# EAGLE board PCB v16 (EAGLE 9.7.0)
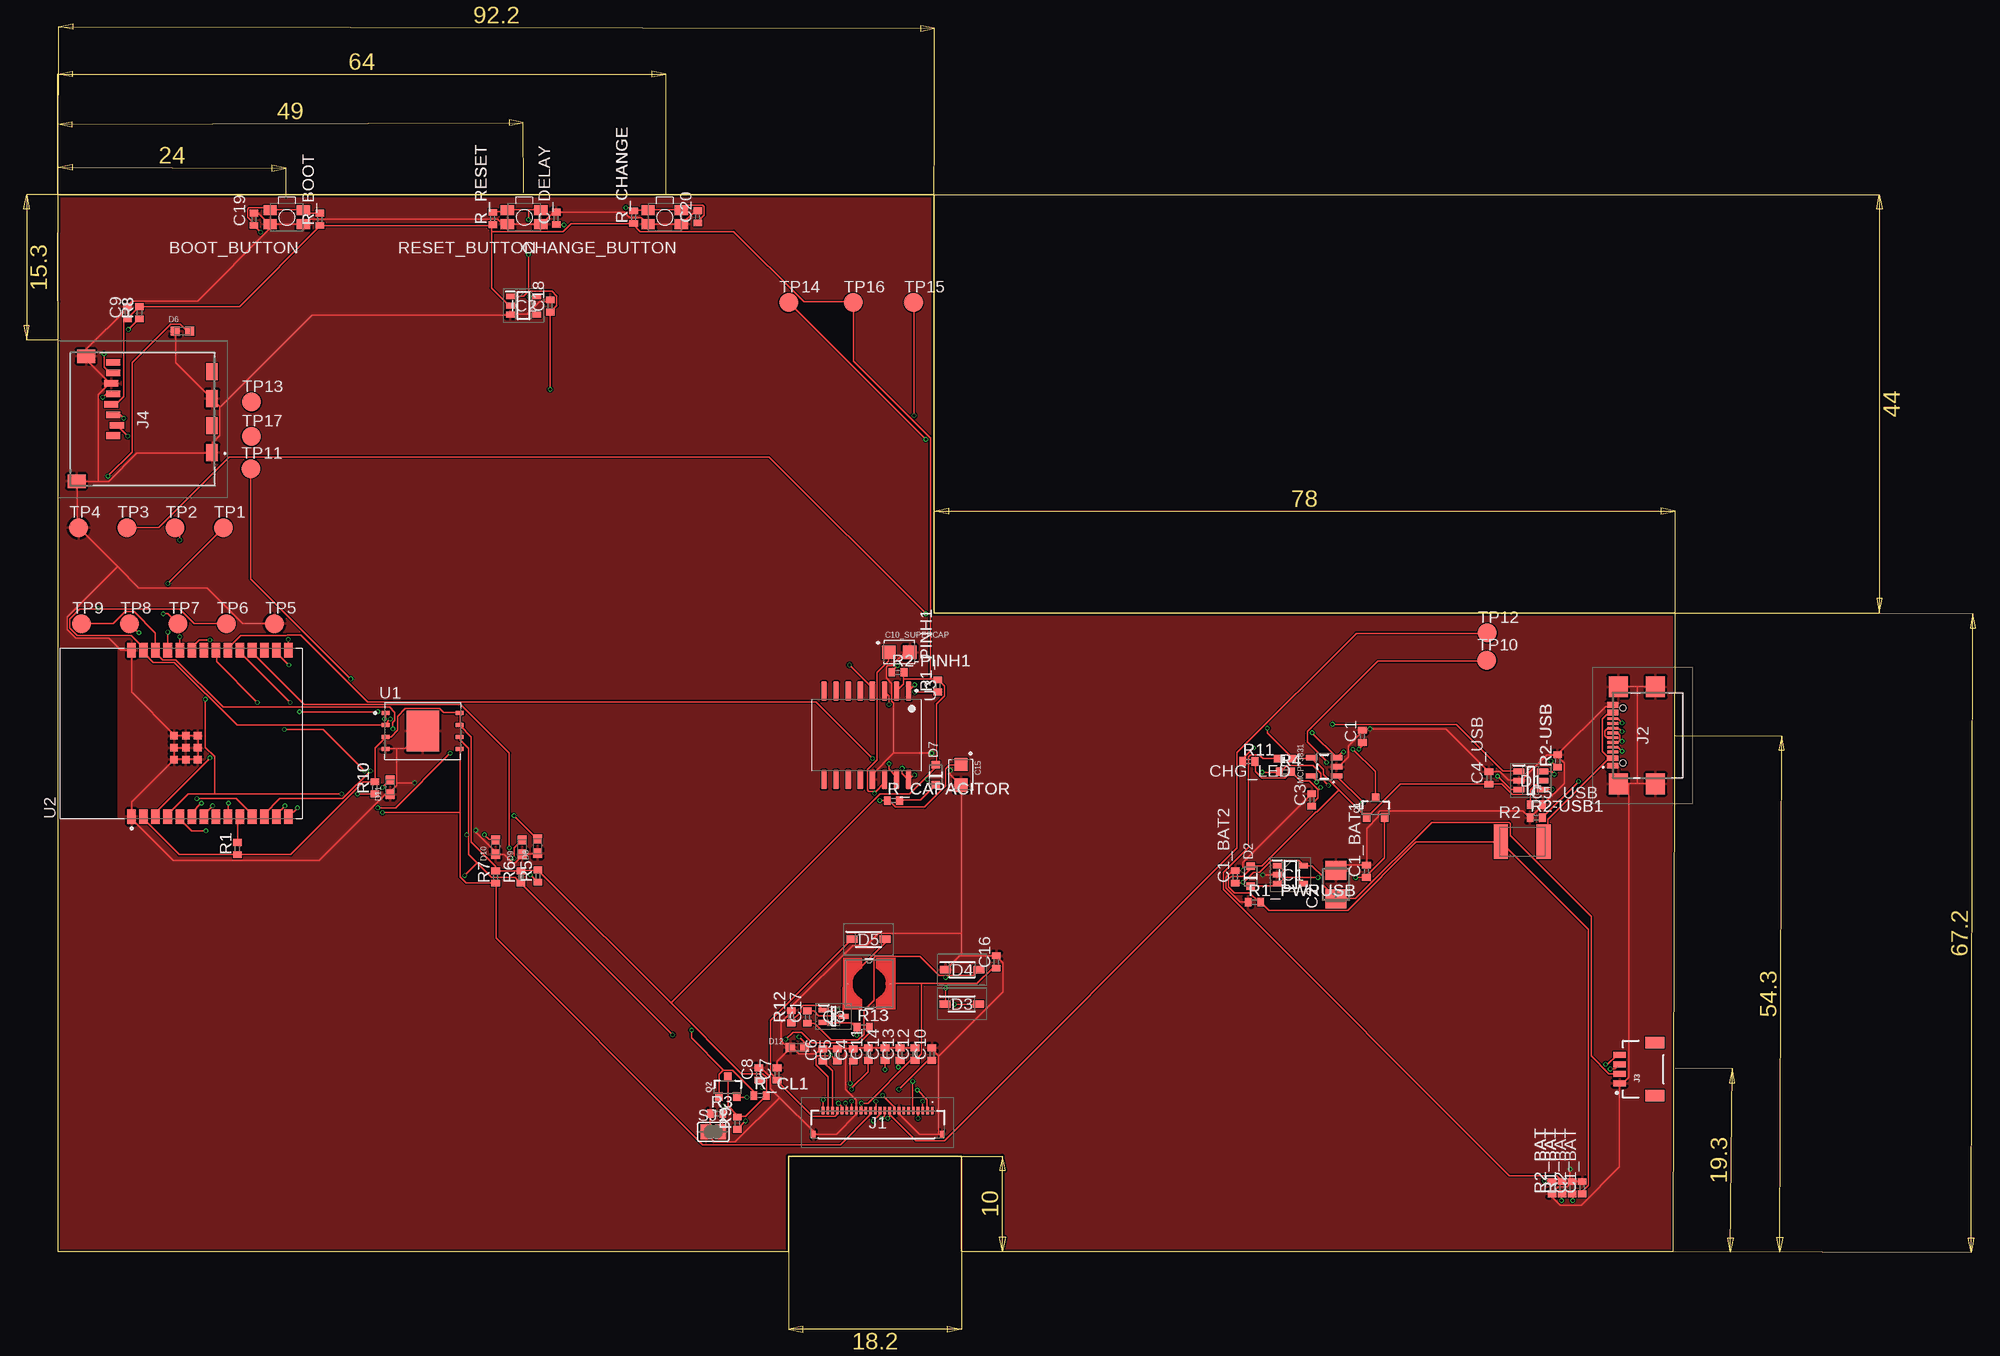
[diagram p0: board, top side]
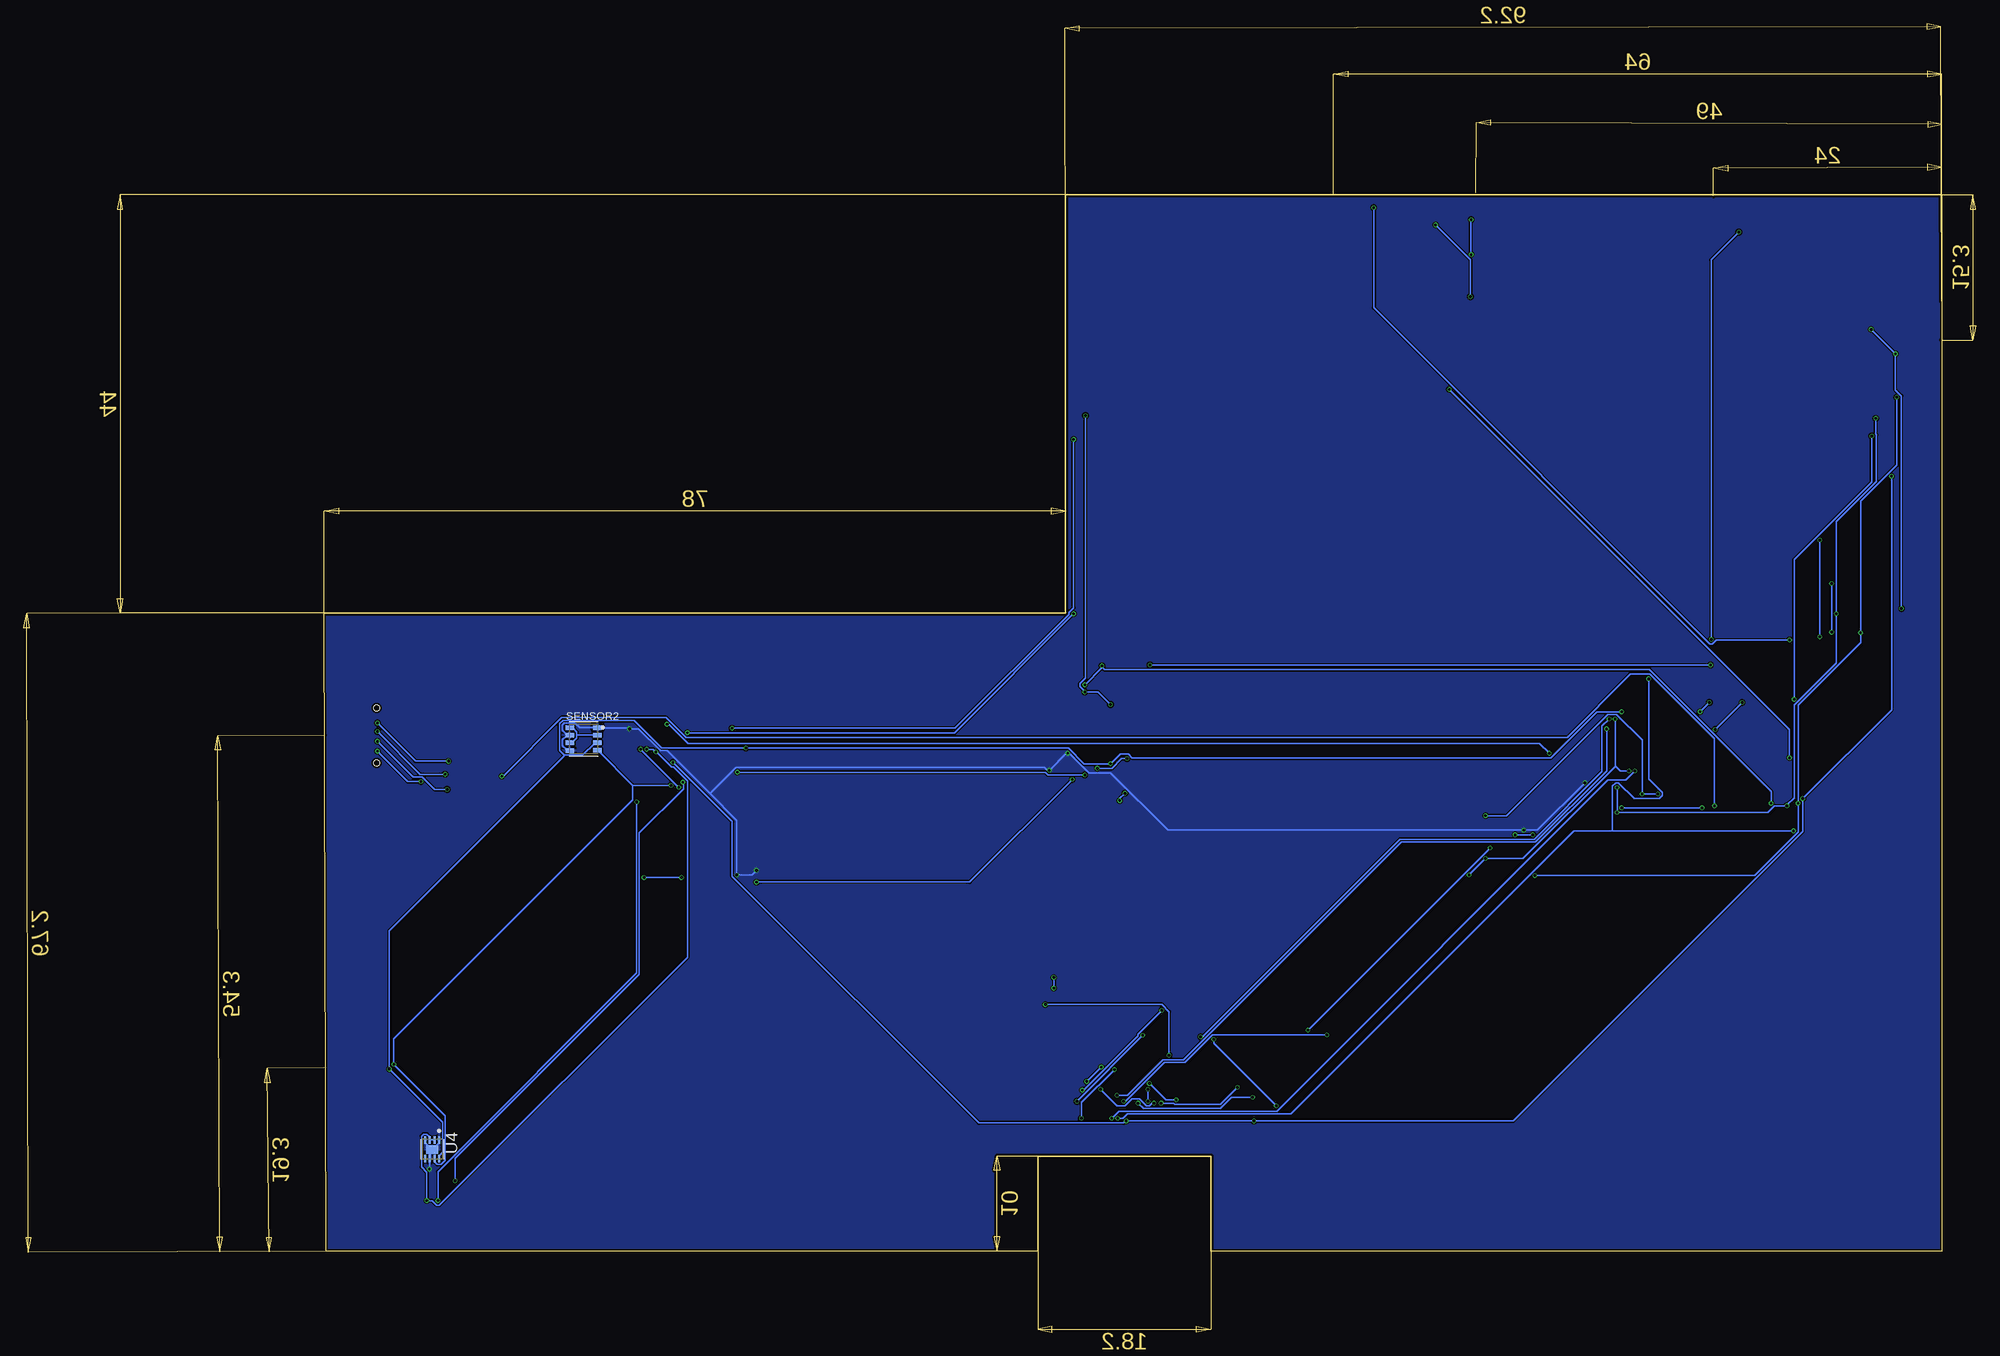
[diagram p1: board, bottom side, seen from below]

Size 170.2 x 111.2 mm. Coordinates in mm from the lower left corner, seen from the top.
Outline: 0,0 76.9,0 76.9,10 95.1,10 95.1,0 170,0 170.2,67.2 92.2,67.2 92.2,111.2 0,111.2 0,0
Copper layers (1*16): Top 0.035mm / dielectric 1.6mm / Bottom 0.035mm
Design rules "jlcpcb-2layers.dru": minimum track width 0.15mm, minimum drill 0.3mm, track to track 5mil, track to pad 5mil, pad to pad 5mil, via to via 5mil, smd to smd 5mil, copper to edge 0.2mm, drill to drill 6mil, minimum pad ring 10mil, minimum via ring 3mil, stop-mask expansion 4mil, vias tented up to drill 0mil, thermal gap 10mil

## Footprints (pad centres in the part's own frame; a part is rotated, then mirrored left to right if it is on the bottom)
MYBUTTON = smd 1.4 x 1.05: 1 1.75,0.75; 2 -1.75,0.75; 3 -1.75,-0.75; 4 1.75,-0.75
ESP32_WROVER_EAGLE-LTSPICE_C0402 = smd 0.7 x 0.9: 1 -0.65,0; 2 0.65,0
RCL_CT3528 = smd 2 x 2.2: + -1.5,0; - 1.5,0
CAPCP3225X100N = smd 1.4 x 1.4: 1 -1.1,0; 2 1.1,0
ADAFRUIT_CHIP-LED0603 = smd 0.8 x 0.8: A 0,-0.75; C 0,0.75
SOT95P280X145-6N = smd 1.2 x 0.6: 1 -1.25,0.95; 2 -1.25,0; 3 -1.25,-0.95; 4 1.25,-0.95; 5 1.25,0; 6 1.25,0.95
ESP32_WROVER_AVX---SD0805S020S1R0_AVX_SD0805S020S1R0_0 = smd 0.8 x 0.9: 1 -1.05,0; 2 1.05,0
SOD3716X135N = smd 1.15 x 0.8: 1 -1.75,0; 2 1.75,0
DIOC1608X36N = smd 0.97 x 0.94: 1 -0.75,0; 2 0.75,0
SOT95P280X120-5N = smd 0.9 x 0.6: 1 -1.4,0.95; 2 -1.4,0; 3 -1.4,-0.95; 4 1.4,-0.95; 5 1.4,0.95
SOT95P280X125-5N = smd 0.9 x 0.6: 1 -1.4,0.95; 2 -1.4,0; 3 -1.4,-0.95; 4 1.4,-0.95; 5 1.4,0.95
FH34SRJ24S05SH99 = smd 0.3 x 0.8: 1 5.75,1.45; 2 5.25,1.45; 3 4.75,1.45; 4 4.25,1.45; 5 3.75,1.45; 6 3.25,1.45; 7 2.75,1.45; 8 2.25,1.45; 9 1.75,1.45; 10 1.25,1.45; 11 0.75,1.45; 12 0.25,1.45; 13 -0.25,1.45; 14 -0.75,1.45; 15 -1.25,1.45; 16 -1.75,1.45; 17 -2.25,1.45; 18 -2.75,1.45; 19 -3.25,1.45; 20 -3.75,1.45; 21 -4.25,1.45; 22 -4.75,1.45; 23 -5.25,1.45; 24 -5.75,1.45 | smd 0.4 x 0.8: MP1 6.75,-1.05; MP2 -6.75,-1.05
SAMACSYS_PARTS_USB4110GFA = smd 0.3 x 1.15: A1 -3.35,3.678; A4 -2.55,3.678; A5 -1.25,3.678; A6 -0.25,3.678; A7 0.25,3.678; A8 1.25,3.678; A9 2.55,3.678; A12 3.35,3.678; B1 3.05,3.678; B4 2.25,3.678; B5 1.75,3.678; B6 0.75,3.678; B7 -0.75,3.678; B8 -1.75,3.678; B9 -2.25,3.678; B12 -3.05,3.678 | smd 2.18 x 2: MP1 -5.11,-0.827; MP2 5.11,-0.827; MP3 -5.11,3.103; MP4 5.11,3.103 | hole 0.65: -2.89,2.603; 2.89,2.603
JST04_1MM_RA = smd 0.6 x 1.35: 1 -1.5,0; 2 -0.5,0; 3 0.5,0; 4 1.5,0 | smd 1.2 x 2: NC1 2.8,-3.675; NC2 -2.8,-3.675
112ATAARR03ATTEND = smd 1.8 x 1.2: G1 10.6,10.4; G2 4.9,10.4; S1 7.75,10.4; S2 2.05,10.4 | smd 1.4 x 1.9: G3 13.6,-3.85; G4 0.45,-2.85 | smd 0.7 x 1.5: P1 8.8,0; P2 7.7,0.4; P3 6.6,0; P4 5.5,-0.2; P5 4.4,0; P6 3.3,-0.2; P7 2.2,0; P8 1.1,0
IND_4828-WE-TPC_WRE = smd 0.127 x 0.127: 1 -2.286,0; 2 2.286,0
ESP32_WROVER_SPARKFUN-IC-POWER_SOT23-5 = smd 0.55 x 1.2: 1 -0.95,-1.3; 2 0,-1.3; 3 0.95,-1.3; 4 0.95,1.3; 5 -0.95,1.3
ESP32_WROVER_SPARKFUN-DISCRETESEMI_SOT23-3 = smd 0.8 x 0.9: 1 -0.95,-1; 2 0.95,-1; 3 0,1.1
SOT65P210X110-3N = smd 1.05 x 0.5: 1 -1.05,0.65; 2 -1.05,-0.65; 3 1.05,0
ESP32_WROVER_EAGLE-LTSPICE_R0402 = smd 0.7 x 0.9: 1 -0.65,0; 2 0.65,0
ESP32C6_VARISTOR_CT/CN1812 = smd 1.5 x 3.6: 1 -2.25,0; 2 2.25,0
ESP32_WROVER_BME680_PSON80P300X300X100-8N = smd 1.016 x 0.5: 1 1.458,1.2; 2 1.458,0.4; 3 1.458,-0.4; 4 1.458,-1.2; 5 -1.458,-1.22; 6 -1.458,-0.4; 7 -1.458,0.4; 8 -1.458,1.2
SJ = smd 1.168 x 1.6: 1 -0.762,0; 2 0.762,0
TP20R = smd 2 x 2: TP 0,0
SON127P600X800X80-9N = smd 0.94 x 0.44: 1 -3.895,1.905; 2 -3.895,0.635; 3 -3.895,-0.635; 4 -3.895,-1.905; 5 3.895,-1.905; 6 3.895,-0.635; 7 3.895,0.635; 8 3.895,1.905 | smd 3.4 x 4.3: 9 0,0
XCVR_ESP32-C6-WROOM-1-N8 = smd 1.5 x 0.9: 1 -8.75,5.26; 2 -8.75,3.99; 3 -8.75,2.72; 4 -8.75,1.45; 5 -8.75,0.18; 6 -8.75,-1.09; 7 -8.75,-2.36; 8 -8.75,-3.63; 9 -8.75,-4.9; 10 -8.75,-6.17; 11 -8.75,-7.44; 12 -8.75,-8.71; 13 -8.75,-9.98; 14 -8.75,-11.25; 15 8.75,-11.25; 16 8.75,-9.98; 17 8.75,-8.71; 18 8.75,-7.44; 19 8.75,-6.17; 20 8.75,-4.9; 21 8.75,-3.63; 22 8.75,-2.36; 23 8.75,-1.09; 24 8.75,0.18; 25 8.75,1.45; 26 8.75,2.72; 27 8.75,3.99; 28 8.75,5.26 | smd 0.8 x 0.8: 29_1 -2.755,0.79; 29_2 -1.505,0.79; 29_3 -0.255,0.79; 29_4 -2.755,-0.46; 29_5 -1.505,-0.46; 29_6 -0.255,-0.46; 29_7 -2.755,-1.71; 29_8 -1.505,-1.71; 29_9 -0.255,-1.71
SOIC127P1032X265-16N = smd 2.05 x 0.59: 1 -4.655,4.445; 2 -4.655,3.175; 3 -4.655,1.905; 4 -4.655,0.635; 5 -4.655,-0.635; 6 -4.655,-1.905; 7 -4.655,-3.175; 8 -4.655,-4.445; 9 4.655,-4.445; 10 4.655,-3.175; 11 4.655,-1.905; 12 4.655,-0.635; 13 4.655,0.635; 14 4.655,1.905; 15 4.655,3.175; 16 4.655,4.445
SON50P200X200X80-9N = smd 0.76 x 0.27: 1 -0.985,0.75; 2 -0.985,0.25; 3 -0.985,-0.25; 4 -0.985,-0.75; 5 0.985,-0.75; 6 0.985,-0.25; 7 0.985,0.25; 8 0.985,0.75 | smd 0.9 x 1.3: 9 0,0

## Placement (x,y rotation side)
BOOT_BUTTON  BUTTON_CUSYOMV1  [MYBUTTON]  24.08,108.83 180 top
C1  100nF  [ESP32_WROVER_EAGLE-LTSPICE_C0402]  137.28,54.2 90 top
C1_BAT  4.7uF  [ESP32_WROVER_EAGLE-LTSPICE_C0402]  160.4,6.7 90 top
C1_BAT1  4.7uF  [ESP32_WROVER_EAGLE-LTSPICE_C0402]  137.7,40 90 top
C1_BAT2  4.7uF  [ESP32_WROVER_EAGLE-LTSPICE_C0402]  123.9,39.4 90 top
C2  100uF TANT  [RCL_CT3528]  134.48,38.6 90 top
C2_BAT  4.7uF  [ESP32_WROVER_EAGLE-LTSPICE_C0402]  159.35,6.7 90 top
C3  100nF  [ESP32_WROVER_EAGLE-LTSPICE_C0402]  131.96,47.5 90 top
C4  [ESP32_WROVER_EAGLE-LTSPICE_C0402]  83.71,20.65 90 top
C4_USB  100nF  [ESP32_WROVER_EAGLE-LTSPICE_C0402]  150.59,49.82 90 top
C5  [ESP32_WROVER_EAGLE-LTSPICE_C0402]  82,20.65 90 top
C5_USB  4.7uF  [ESP32_WROVER_EAGLE-LTSPICE_C0402]  155.6,47.02 0 top
C6  [ESP32_WROVER_EAGLE-LTSPICE_C0402]  80.49,20.65 90 top
C7  [ESP32_WROVER_EAGLE-LTSPICE_C0402]  75.68,18.65 90 top
C8  [ESP32_WROVER_EAGLE-LTSPICE_C0402]  73.77,18.65 90 top
C9  [ESP32_WROVER_EAGLE-LTSPICE_C0402]  7.3,98.8 90 top
C10  [ESP32_WROVER_EAGLE-LTSPICE_C0402]  91.98,20.75 90 top
C10_SUPERCAP  CPH3225A  [CAPCP3225X100N]  88.55,63.04 0 top
C11  [ESP32_WROVER_EAGLE-LTSPICE_C0402]  85.3,20.75 90 top
C12  [ESP32_WROVER_EAGLE-LTSPICE_C0402]  90.2,20.75 90 top
C13  [ESP32_WROVER_EAGLE-LTSPICE_C0402]  88.62,20.75 90 top
C14  [ESP32_WROVER_EAGLE-LTSPICE_C0402]  87.04,20.75 90 top
C15  100nF  [CAPCP3225X100N]  95.03,50.14 270 top
C16  [ESP32_WROVER_EAGLE-LTSPICE_C0402]  98.76,30.45 90 top
C17  [ESP32_WROVER_EAGLE-LTSPICE_C0402]  78.88,24.65 90 top
C18  [ESP32_WROVER_EAGLE-LTSPICE_C0402]  51.8,99.5 90 top
C19  100nF  [ESP32_WROVER_EAGLE-LTSPICE_C0402]  20.64,108.61 90 top
C20  100nF  [ESP32_WROVER_EAGLE-LTSPICE_C0402]  67.32,108.88 90 top
C_DELAY  100nF  [ESP32_WROVER_EAGLE-LTSPICE_C0402]  52.43,108.72 90 top
CHANGE_BUTTON  BUTTON_CUSYOMV1  [MYBUTTON]  63.86,108.83 180 top
CHG_LED  [ADAFRUIT_CHIP-LED0603]  129.14,51.85 90 top
D1  USBLC6-2SC6Y  [SOT95P280X145-6N]  155,49.54 0 top
D2  SD0805S020S1R0  [ESP32_WROVER_AVX---SD0805S020S1R0_AVX_SD0805S020S1R0_0]  125.53,39.46 90 top
D3  MBR0530  [SOD3716X135N]  95.12,26.03 0 top
D4  MBR0530  [SOD3716X135N]  95.16,29.63 0 top
D5  MBR0530  [SOD3716X135N]  85.3,32.83 0 top
D6  PGB1010603MR  [DIOC1608X36N]  13.1,96.84 0 top
D7  ESP32_WROVER_AVX---SD0805S020S1R0_AVX_SD0805S020S1R0_0_0AVX_SD0805S020S1R0_0_0  [ESP32_WROVER_AVX---SD0805S020S1R0_AVX_SD0805S020S1R0_0]  92.38,50.16 90 top
D8  PGB1010603MR  [DIOC1608X36N]  50.48,42.64 90 top
D9  PGB1010603MR  [DIOC1608X36N]  48.86,42.54 90 top
D10  PGB1010603MR  [DIOC1608X36N]  46.04,42.54 90 top
D11  PGB1010603MR  [DIOC1608X36N]  34.95,48.85 90 top
D12  PGB1010603MR  [DIOC1608X36N]  77.83,21.45 0 top
IC1  XC6220A331MR-G  [SOT95P280X120-5N]  129.71,39.64 0 top
IC2  BD5229G-TR  [SOT95P280X125-5N]  49,99.54 0 top
J1  FH34SRJ-24S-0.5SH_99_  [FH34SRJ24S05SH99]  86.27,13.35 0 top
J2  SAMACSYS_PARTS_USB4110-GF-A  [SAMACSYS_PARTS_USB4110GFA]  167.3,54.3 90 top
J3  QWIIC_RIGHT_ANGLE  [JST04_1MM_RA]  164.36,19.17 90 top
J4  112A-TAAR-R03_ATTEND  [112ATAARR03ATTEND]  5.82,94.65 270 top
L1  66uH  [IND_4828-WE-TPC_WRE]  85.37,28.15 0 top
MCP73831  ESP32_WROVER_SPARKFUN-IC-POWER_MCP73831  [ESP32_WROVER_SPARKFUN-IC-POWER_SOT23-5]  133.26,50.99 90 top
Q1  20V/4.2A/52mΩ/1.4W  [ESP32_WROVER_SPARKFUN-DISCRETESEMI_SOT23-3]  138.66,46.66 0 top
Q2  20V/4.2A/52mΩ/1.4W  [ESP32_WROVER_SPARKFUN-DISCRETESEMI_SOT23-3]  70.48,17.26 0 top
Q3  SI1308EDL-T1-GE3  [SOT65P210X110-3N]  81.63,24.73 0 top
R1  10K  [ESP32_WROVER_EAGLE-LTSPICE_R0402]  18.9,42.38 90 top
R1_BAT  200  [ESP32_WROVER_EAGLE-LTSPICE_R0402]  158.3,6.7 90 top
R1_PINH1  10K  [ESP32_WROVER_EAGLE-LTSPICE_R0402]  92.61,59.52 90 top
R1_PWRUSB  100K  [ESP32_WROVER_EAGLE-LTSPICE_R0402]  125.91,36.74 0 top
R2  PFMF.050.1  [ESP32C6_VARISTOR_CT/CN1812]  154.11,43.1 0 top
R2-PINH1  10K  [ESP32_WROVER_EAGLE-LTSPICE_R0402]  88.39,60.92 0 top
R2-USB  5k1  [ESP32_WROVER_EAGLE-LTSPICE_R0402]  157.82,51.6 90 top
R2-USB1  5k1  [ESP32_WROVER_EAGLE-LTSPICE_R0402]  155.57,45.62 0 top
R2_BAT  2K  [ESP32_WROVER_EAGLE-LTSPICE_R0402]  157.25,6.7 90 top
R3  2.2  [ESP32_WROVER_EAGLE-LTSPICE_R0402]  69.32,14.48 0 top
R4  [ESP32_WROVER_EAGLE-LTSPICE_R0402]  129.16,50.45 0 top
R5  10K  [ESP32_WROVER_EAGLE-LTSPICE_R0402]  50.52,39.48 90 top
R6  10K  [ESP32_WROVER_EAGLE-LTSPICE_R0402]  48.74,39.38 90 top
R7  10K  [ESP32_WROVER_EAGLE-LTSPICE_R0402]  46.06,39.38 90 top
R8  10K  [ESP32_WROVER_EAGLE-LTSPICE_R0402]  8.58,98.78 90 top
R9  10K  [ESP32_WROVER_EAGLE-LTSPICE_R0402]  71.5,13.48 90 top
R10  10K  [ESP32_WROVER_EAGLE-LTSPICE_R0402]  33.36,48.78 90 top
R11  [ESP32_WROVER_EAGLE-LTSPICE_R0402]  125.32,51.55 0 top
R12  10K  [ESP32_WROVER_EAGLE-LTSPICE_R0402]  77.18,24.68 90 top
R13  0.47  [ESP32_WROVER_EAGLE-LTSPICE_R0402]  84.74,23.58 0 top
R_BOOT  10K  [ESP32_WROVER_EAGLE-LTSPICE_R0402]  27.58,108.61 90 top
R_CAPACITOR  15  [ESP32_WROVER_EAGLE-LTSPICE_R0402]  87.91,47.44 0 top
R_CHANGE  10K  [ESP32_WROVER_EAGLE-LTSPICE_R0402]  60.58,108.84 90 top
R_CL1  10K  [ESP32_WROVER_EAGLE-LTSPICE_R0402]  73.9,16.4 0 top
R_RESET  10K  [ESP32_WROVER_EAGLE-LTSPICE_R0402]  45.75,108.71 90 top
RESET_BUTTON  BUTTON_CUSYOMV1  [MYBUTTON]  49.06,108.83 180 top
SENSOR2  BME688  [ESP32_WROVER_BME680_PSON80P300X300X100-8N]  142.92,53.92 0 bottom
SJ1  [SJ]  68.96,12.56 0 top
TP1  TPTP20R  [TP20R]  17.41,76.16 0 top
TP2  TPTP20R  [TP20R]  12.33,76.16 0 top
TP3  TPTP20R  [TP20R]  7.25,76.16 0 top
TP4  TPTP20R  [TP20R]  2.17,76.16 0 top
TP5  TPTP20R  [TP20R]  22.79,66.06 0 top
TP6  TPTP20R  [TP20R]  17.71,66.06 0 top
TP7  TPTP20R  [TP20R]  12.63,66.06 0 top
TP8  TPTP20R  [TP20R]  7.55,66.06 0 top
TP9  TPTP20R  [TP20R]  2.47,66.06 0 top
TP10  TPTP20R  [TP20R]  150.37,62.18 0 top
TP11  TPTP20R  [TP20R]  20.29,82.36 0 top
TP12  TPTP20R  [TP20R]  150.42,65.08 0 top
TP13  TPTP20R  [TP20R]  20.37,89.38 0 top
TP14  TPTP20R  [TP20R]  76.89,99.86 0 top
TP15  TPTP20R  [TP20R]  90.04,99.86 0 top
TP16  TPTP20R  [TP20R]  83.69,99.86 0 top
TP17  TPTP20R  [TP20R]  20.34,85.76 0 top
U1  W25Q512JVEIQ  [SON127P600X800X80-9N]  38.39,54.76 0 top
U2  ESP32-C6-WROOM-1-N8  [XCVR_ESP32-C6-WROOM-1-N8]  13,54.5 90 top
U3  DS3231SN#  [SOIC127P1032X265-16N]  85.07,54.3 270 top
U4  MAX17048G+T10  [SON50P200X200X80-9N]  158.85,10.72 270 bottom

## Library data of the parts
BOOT_BUTTON CHANGE_BUTTON CHG_LED R2 RESET_BUTTON SJ1 TP1-TP17 = DeskAssistant v19 v1
C1 C1_BAT C1_BAT1 C1_BAT2 C2_BAT C3 C4 C4_USB C5 C5_USB C6-C14 C16-C20 C_DELAY = DeskAssistant v19 v1; SPICEMODEL: NONE; SPICEPREFIX: C
C2 = DeskAssistant v19 v1; SPICEPREFIX: C
C10_SUPERCAP C15 = DeskAssistant v19 v1; AVAILABILITY: Not in stock; CHECK_PRICES: https://www.snapeda.com/parts/CPH3225A/Seiko+Instruments/view-part/?ref=eda; DESCRIPTION: 11 mF (EDLC) Supercapacitor 3.3 V 1210 (3225 Metric) - -; MF: Seiko Instruments; MP: CPH3225A; PACKAGE: 1210 Seiko; PRICE: None; PURCHASE-URL: https://www.snapeda.com/api/url_track_click_mouser/?unipart_id=562593&manufacturer=Seiko Instruments&part_name=CPH3225A&search_term=None; SNAPEDA_LINK: https://www.snapeda.com/parts/CPH3225A/Seiko+Instruments/view-part/?ref=snap
D1 = DeskAssistant v19 v1; AVAILABILITY: In Stock; CHECK_PRICES: https://www.snapeda.com/parts/USBLC6-2SC6Y/STMicroelectronics/view-part/?ref=eda; DESCRIPTION: 17V Clamp 5A (8/20µs) Ipp Tvs Diode Surface Mount SOT-23-6; MF: STMicroelectronics; MP: USBLC6-2SC6Y; PACKAGE: SOT-23-6 STMicroelectronics; PRICE: None; SNAPEDA_LINK: https://www.snapeda.com/parts/USBLC6-2SC6Y/STMicroelectronics/view-part/?ref=snap
D2 D7 = DeskAssistant v19 v1; CENTROID_NOT_SPECIFIED: No; DATASHEET: http://datasheets.avx.com/schottky.pdf; DIGIKEY_DESCRIPTION: DIODE SCHOTTKY 20V 1A 0805; DIGIKEY_PART_NUMBER: 478-7800-1-ND; LEAD_FREE: yes; MF: AVX; MOUSER_PART_NUMBER: 581-SD0805S020S1R0; PACKAGE: 0805 (2012 metric); PREFIX: D; ROHS: yes; TEMPERATURE_RANGE_HIGH: +125°C; TEMPERATURE_RANGE_LOW: -55°C
D3-D5 = DeskAssistant v19 v1; AVAILABILITY: In Stock; CHECK_PRICES: https://www.snapeda.com/parts/MBR0530/Onsemi/view-part/?ref=eda; DESCRIPTION: Diode Schottky 30 V 500mA Surface Mount SOD-123; MF: ON Semiconductor; MP: MBR0530; PACKAGE: SOD-123-2 ON Semiconductor; PRICE: None; PURCHASE-URL: https://www.snapeda.com/api/url_track_click_mouser/?unipart_id=179458&manufacturer=ON Semiconductor&part_name=MBR0530&search_term=None; SNAPEDA_LINK: https://www.snapeda.com/parts/MBR0530/Onsemi/view-part/?ref=snap
D6 D8-D12 = DeskAssistant v19 v1; AVAILABILITY: In Stock; CHECK_PRICES: https://www.snapeda.com/parts/PGB1010603MR/Littelfuse/view-part/?ref=eda; DESCRIPTION: 150V (Typ) Clamp - Ipp Tvs Diode Surface Mount 0603 (1608 Metric); MF: Littelfuse Inc.; MP: PGB1010603MR; PACKAGE: 0603 Littelfuse Inc.; PRICE: None; PURCHASE-URL: https://www.snapeda.com/api/url_track_click_mouser/?unipart_id=5659453&manufacturer=Littelfuse Inc.&part_name=PGB1010603MR&search_term=None; SNAPEDA_LINK: https://www.snapeda.com/parts/PGB1010603MR/Littelfuse/view-part/?ref=snap
IC1 = DeskAssistant v19 v1; DESCRIPTION: LDO Voltage Regulators; HEIGHT: 1.2mm; MANUFACTURER_NAME: Torex; MANUFACTURER_PART_NUMBER: XC6220A331MR-G; MOUSER_PART_NUMBER: 865-XC6220A331MR-G; MOUSER_PRICE-STOCK: https://www.mouser.co.uk/ProductDetail/Torex-Semiconductor/XC6220A331MR-G?qs=AsjdqWjXhJ8ZSWznL1J0gg%3D%3D
IC2 = DeskAssistant v19 v1; DESCRIPTION: Voltage Detector with Adjustable Delay Time: CMOS processes are utilized to develop high precision, low current consumption CMOS reset ICs that allow arbitrary setting of the delay time. The extensive lineup includes both Nch Open Drain and CMOS output types in a wide range of detection voltages (from 2.3V to 6.0V, in 0.1V steps), enabling selection of the ideal solution based on customer requirements. In addition, the entire series is of course both lead-free and RoHS-compliant.; HEIGHT: 1.25mm; MANUFACTURER_NAME: ROHM Semiconductor; MANUFACTURER_PART_NUMBER: BD5229G-TR; MOUSER_PART_NUMBER: 755-BD5229G-TR; MOUSER_PRICE-STOCK: https://www.mouser.co.uk/ProductDetail/ROHM-Semiconductor/BD5229G-TR?qs=4kLU8WoGk0vvnhrrYwdszw%3D%3D
J1 = DeskAssistant v19 v1; DESCRIPTION: 24 Position FFC, FPC Connector Contacts, Top and Bottom 0.020" (0.50mm) Surface Mount, Right Angle; HEIGHT: 1.1mm; MANUFACTURER_NAME: Hirose; MANUFACTURER_PART_NUMBER: FH34SRJ-24S-0.5SH(99); MOUSER_PART_NUMBER: 798-FH34SRJ24S05SH99; MOUSER_PRICE-STOCK: https://www.mouser.co.uk/ProductDetail/Hirose-Connector/FH34SRJ-24S-0.5SH99?qs=vcbW%252B4%252BSTIpKBl5ap9J8Fw%3D%3D
J2 = DeskAssistant v19 v1; DESCRIPTION: CONN USB 2.0 TYPE-C R/A SMT; HEIGHT: 3.26mm; MANUFACTURER_NAME: GCT (GLOBAL CONNECTOR TECHNOLOGY); MANUFACTURER_PART_NUMBER: USB4110-GF-A; MOUSER_PART_NUMBER: 640-USB4110-GF-A; MOUSER_PRICE-STOCK: https://www.mouser.co.uk/ProductDetail/GCT/USB4110-GF-A?qs=KUoIvG%2F9IlYiZvIXQjyJeA%3D%3D
J3 = DeskAssistant v19 v1; PROD_ID: CONN-13694
J4 = DeskAssistant v19 v1; DESCRIPTION: Micro SD Card Socket, Push-Push Type, Top Mount, SMT, H=1.83mm, 10u; HEIGHT: 1.9mm; MANUFACTURER_NAME: ATTEND; MANUFACTURER_PART_NUMBER: 112A-TAAR-R03 ATTEND
L1 = DeskAssistant v19 v1; COPYRIGHT: Copyright (C) 2024 Ultra Librarian. All rights reserved.; MANUFACTURER_PART_NUMBER: 744043680; MFR_NAME: Wurth Electronics
MCP73831 = DeskAssistant v19 v1; PROD_ID: IC-09995
Q1 Q2 = DeskAssistant v19 v1; PROD_ID: TRAN-14388
Q3 = DeskAssistant v19 v1; AVAILABILITY: In Stock; CHECK_PRICES: https://www.snapeda.com/parts/SI1308EDL-T1-GE3/Vishay+Siliconix/view-part/?ref=eda; DESCRIPTION: Si1308EDL-T1-GE3 N-channel MOSFET Transistor, 1.5 A, 30 V, 3-Pin SC-70 | Siliconix / Vishay SI1308EDL-T1-GE3; MF: Vishay Siliconix; MP: SI1308EDL-T1-GE3; PACKAGE: SOT-323 Vishay Semiconductor; PRICE: None; PURCHASE-URL: https://www.snapeda.com/api/url_track_click_mouser/?unipart_id=274603&manufacturer=Vishay Siliconix&part_name=SI1308EDL-T1-GE3&search_term=None; SNAPEDA_LINK: https://www.snapeda.com/parts/SI1308EDL-T1-GE3/Vishay+Siliconix/view-part/?ref=snap
R1 R1_BAT R1_PINH1 R1_PWRUSB R2-PINH1 R2-USB R2-USB1 R2_BAT R3-R13 R_BOOT R_CAPACITOR R_CHANGE R_CL1 R_RESET = DeskAssistant v19 v1; SPICEMODEL: NONE; SPICEPREFIX: R
SENSOR2 = DeskAssistant v19 v1; AVAILABILITY: Unavailable; DESCRIPTION: Integrated Environmental Unit; MF: Bosch Sensortec; MP: BME680; PACKAGE: LGA-8 Bosch Tools; PRICE: None
U1 = DeskAssistant v19 v1; AVAILABILITY: In Stock; CHECK_PRICES: https://www.snapeda.com/parts/W25Q512JVEIQ/Winbond+Electronics/view-part/?ref=eda; DESCRIPTION: FLASH - NOR Memory IC 512Mb (64M x 8) SPI - Quad I/O 133 MHz 8-WSON (8x6); MF: Winbond Electronics; MP: W25Q512JVEIQ; PACKAGE: Package; PRICE: None; SNAPEDA_LINK: https://www.snapeda.com/parts/W25Q512JVEIQ/Winbond+Electronics/view-part/?ref=snap
U2 = DeskAssistant v19 v1; AVAILABILITY: In Stock; CHECK_PRICES: https://www.snapeda.com/parts/ESP32-C6-WROOM-1-N8/Espressif+Systems/view-part/?ref=eda; DESCRIPTION: Multiprotocol Modules ESP32-C6 module, Wi-Fi 6 in 2.4 GHz band, Bluetooth 5, Zigbee 3.0 and Thread. ESP34-WROOM Compatible - ENGINEERING SAMPLE; MF: Espressif Systems; MP: ESP32-C6-WROOM-1-N8; PACKAGE: None; PRICE: None; SNAPEDA_LINK: https://www.snapeda.com/parts/ESP32-C6-WROOM-1-N8/Espressif+Systems/view-part/?ref=snap
U3 = DeskAssistant v19 v1; AVAILABILITY: In Stock; CHECK_PRICES: https://www.snapeda.com/parts/DS3231SN%23/Analog+Devices/view-part/?ref=eda; DESCRIPTION: Extremely Accurate I²C-Integrated RTC/TCXO/Crystal; MF: Analog Devices; MP: DS3231SN#; PACKAGE: SOIC-16 Maxim; PRICE: None; PURCHASE-URL: https://www.snapeda.com/api/url_track_click_mouser/?unipart_id=99048&manufacturer=Analog Devices&part_name=DS3231SN#&search_term=None; SNAPEDA_LINK: https://www.snapeda.com/parts/DS3231SN%23/Analog+Devices/view-part/?ref=snap
U4 = DeskAssistant v19 v1; AVAILABILITY: In Stock; CHECK_PRICES: https://www.snapeda.com/parts/MAX17048G+T10/Analog+Devices/view-part/?ref=eda; DESCRIPTION: 3µA 1-Cell/2-Cell Fuel Gauge with ModelGauge; MF: Analog Devices; MP: MAX17048G+T10; PACKAGE: TDFN-8 Maxim; PRICE: None; PURCHASE-URL: https://www.snapeda.com/api/url_track_click_mouser/?unipart_id=329239&manufacturer=Analog Devices&part_name=MAX17048G+T10&search_term=None; SNAPEDA_LINK: https://www.snapeda.com/parts/MAX17048G+T10/Analog+Devices/view-part/?ref=snap

## Nets
3V3 [New Class]: C1_BAT2.1 C2.+ C9.1 D7.2 IC1.5 IC2.2 J3.2 J4.P4 Q2.3 R1.1 R1_PINH1.2 R2-PINH1.2 R5.2 R6.2 R7.2 R8.2 R9.2 R10.2 R_BOOT.1 R_CHANGE.1 R_CL1.2 R_RESET.1 TP16.TP U1.3 U1.7 U1.8 U2.2 U3.2
32KHZ: R2-PINH1.1 U2.9 U3.1
DN: D1.4 J2.A7 J2.B7
DP: D1.6 J2.A6 J2.B6
EPD: TP17.TP
EPD_3V3 [New Class]: C12.1 C16.1 J1.15 J1.16 L1.2 Q2.2
EPD_3V3_C [New Class]: Q2.1 R_CL1.1 U2.18
EPD_BUSY: J1.9 TP9.TP U2.26
EPD_CS: D6.2 J1.12 R9.1 TP10.TP U2.11
EPD_DC: J1.11 TP11.TP U2.5
EPD_EVE_C: TP13.TP
EPD_RST: J1.10 TP12.TP U2.21
FLASH_CS: D9.2 R5.1 U1.1 U2.12
GDR: J1.2 Q3.1 R12.1
GND: BOOT_BUTTON.1 BOOT_BUTTON.2 C1.2 C1_BAT1.2 C1_BAT2.2 C1_BAT.2 C2.- C2_BAT.2 C3.2 C4.2 C4_USB.2 C5.2 C5_USB.2 C6.2 C7.2 C8.2 C9.2 C10.2 C10_SUPERCAP.2 C11.2 C12.2 C13.2 C14.2 C15.2 C16.2 C18.2 C19.2 C20.2 C_DELAY.2 CHANGE_BUTTON.1 CHANGE_BUTTON.2 D1.2 D4.1 D6.1 D8.1 D9.1 D10.1 D11.1 D12.1 IC1.2 IC2.3 J1.8 J1.17 J1.MP1 J1.MP2 J2.A1 J2.A12 J2.B1 J2.B12 J2.MP1 J2.MP2 J2.MP3 J2.MP4 J3.1 J4.G1 J4.G2 J4.G3 J4.G4 J4.P6 MCP73831.2 R1_PWRUSB.1 R2-USB1.1 R2-USB.2 R2_BAT.1 R3.1 R12.2 RESET_BUTTON.1 RESET_BUTTON.2 SENSOR2.1 SENSOR2.5 SENSOR2.7 SJ1.1 TP4.TP TP5.TP U1.4 U1.9 U2.1 U2.28 U2.29_1 U2.29_2 U2.29_3 U2.29_4 U2.29_5 U2.29_6 U2.29_7 U2.29_8 U2.29_9 U3.13 U4.1 U4.4 U4.6 U4.9
GPIO8: R1.2 U2.10
I2C_P: U2.17
I2C_PW: C1.1 C3.1 R4.2 R11.2
IC2_PW: SENSOR2.2 SENSOR2.6 SENSOR2.8
INT_RC: U2.8
INT_RTC: R1_PINH1.1 TP15.TP U3.3
IO/BOOT: BOOT_BUTTON.3 BOOT_BUTTON.4 C19.1 R_BOOT.2 U2.15
IO/CHANGE: C20.1 CHANGE_BUTTON.3 CHANGE_BUTTON.4 R_CHANGE.2 U2.23
MISO: D12.2 J4.P7 R8.1 TP6.TP U1.2 U2.27
MOSI: D11.2 J1.14 J4.P3 R7.1 TP7.TP U1.5 U2.7
N$1: J2.A5 R2-USB1.2
N$2: C4.1 J1.24
N$3: C1_BAT1.1 D2.1 IC1.1 IC1.3 Q1.2
N$4: CHG_LED.C R1_BAT.2
N$5: MCP73831.5 R2_BAT.2
N$6: J2.B5 R2-USB.1
N$7: MCP73831.1 R1_BAT.1
N$8: D7.1 R_CAPACITOR.2
N$9: C6.1 J1.22
N$10: C_DELAY.1 IC2.5
N$11: C8.1 J1.20
N$12: C10.1 J1.19
N$13: C11.1 J1.18
N$15: C17.1 D3.1 D4.2
N$22: C13.1 J1.5
N$23: C14.1 J1.4
PREVGH: C7.1 D5.1 J1.21
PREVGL: C5.1 D3.2 J1.23
RESE: J1.3 Q3.2 R13.1
RESE': R3.2 R13.2 SJ1.2
RESET: C18.1 IC2.1 R_RESET.2 RESET_BUTTON.3 RESET_BUTTON.4 U2.3
RTC_RST: U2.16 U3.4
RX: TP2.TP U2.24
SCK: D10.2 J1.13 J4.P5 R6.1 TP8.TP U1.6 U2.6
SCL: J3.4 R4.1 SENSOR2.4 U2.20 U3.16 U4.7
SDA: J3.3 R11.1 SENSOR2.3 U2.19 U3.15 U4.8
SRC: C17.2 D5.2 L1.1 Q3.3
SS_SD: D8.2 J4.P2 R10.1 U2.4
TX: TP1.TP U2.25
USB_D+: D1.1 U2.14
USB_D-: D1.3 U2.13
VBAT: C2_BAT.1 MCP73831.3 Q1.3 TP3.TP U4.2 U4.3
VBUS [New Class]: C1_BAT.1 C4_USB.1 C5_USB.1 CHG_LED.A D1.5 D2.2 MCP73831.4 Q1.1 R1_PWRUSB.2 R2.1 TP14.TP
VRTC: C10_SUPERCAP.1 C15.1 R_CAPACITOR.1 U3.14
VUSB [New Class]: J2.A4 J2.A9 J2.B4 J2.B9 R2.2

## Tracks (layer width: path | path; a pad name or v marks a point on that pad's centre or on a via)
3V3  (via drill 0.3)
  Top 0.15: J4.P4 5.68,89.19 6.16,89.19 6.92,89.96 6.92,97.78 7.27,98.13 C9.1 7.34,98.2 8.52,99.37 R8.2 8.59,99.44 19.11,99.44 27.56,107.89 R_BOOT.1 27.63,107.96 45.64,107.96 45.7,108.03 R_RESET.1 45.64,107.89 45.64,107.34 | 45.64,107.34 45.64,101.38 47.44,99.58 47.58,99.58 IC2.2 | 45.64,107.34 53.18,107.34 54.02,108.17 60.52,108.17 R_CHANGE.1 60.52,108.1 61.29,107.34 71.12,107.34 78.53,99.93 83.65,99.93 TP16.TP 83.72,99.86 83.72,93.69 91.83,85.59 91.83,60.25 | 124.72,38.78 123.96,38.78 C1_BAT2.1 | 124.72,38.78 125.83,39.89 126.45,39.89 127.7,41.13 130.61,41.13 131.09,40.65 IC1.5 131.16,40.58 131.99,40.58 133.17,39.4 133.17,38.5 134.48,37.19 C2.+ 134.48,37.12 136.56,37.12 144.59,45.15 152.7,45.15 152.84,45.01 152.84,43.77 161.35,35.25 161.35,20.57 163.22,18.7 164.33,18.7 J3.2 | 88.99,60.25 88.99,59.69 88.29,59 U3.2 | 88.99,60.25 88.99,60.87 R2-PINH1.2 | 91.83,60.25 92.52,60.25 92.59,60.18 R1_PINH1.2 92.66,60.11 93.28,59.49 93.28,58.45 92.45,57.62 92.45,51.24 D7.2 92.38,51.18 92.38,50.9 91.31,49.83 | 91.83,60.25 88.99,60.25 | U2.2 9.07,45.7 9.07,45.43 12.74,41.76 18.84,41.76 R1.1 18.91,41.76 24.52,41.76 32.13,49.38 33.31,49.38 R10.2 33.38,49.44 33.38,52.98 34.49,54.08 U1.3 34.56,54.15 35.04,54.15 35.73,54.85 35.73,56.3 36.56,57.13 40.16,57.13 40.58,56.72 42.24,56.72 U1.8 42.31,56.65 42.31,55.4 U1.7 42.31,55.33 43.49,54.15 43.49,43.07 46.05,40.51 46.05,40.1 R7.2 46.12,40.03 48.68,40.03 R6.2 48.75,40.1 50.48,40.1 R5.2 50.55,40.1 64.51,26.14 | Q2.3 70.5,18.35 70.5,15.3 71.53,14.27 R9.2 71.53,14.2 72.37,14.2 74.51,16.34 R_CL1.2 74.58,16.41 74.58,18.28 74.17,18.7 71.95,18.7 64.51,26.14
  Top 0.15: 91.31,49.83 89.61,48.13 86.49,48.13 64.51,26.14 | 91.31,49.83 v91.48,49.65 | v124.72,38.85 124.72,38.78
  Bottom 0.15: v124.72,38.85 102.28,38.85 v91.48,49.65
32KHZ  (via drill 0.3)
  Top 0.15: v88.36,61.63 87.81,61.08 87.81,60.94 R2-PINH1.1 | v90.16,59.62 89.54,59 U3.1 | v17.94,47.16 17.94,45.77 U2.9
  Bottom 0.15: v90.16,59.62 88.36,61.42 v88.36,61.63 88.29,61.42 88.09,61.22 30.75,61.22 17.94,48.41 v17.94,47.16
DN  (via drill 0.3)
  Top 0.15: 164.4,53.81 164.19,53.6 163.64,53.6 J2.B7 | 164.4,53.81 164.4,54.29 164.19,54.5 163.64,54.5 J2.A7 | v157.27,48.61 156.3,48.61 D1.4 | v164.61,53.67 164.47,53.81 164.4,53.81
  Bottom 0.15: v157.27,48.61 158.58,48.61 159.9,49.93 160.87,49.93 v164.61,53.67
DP  (via drill 0.3)
  Top 0.15: J2.A6 163.57,54.08 163.01,54.08 162.81,54.29 162.81,54.78 163.01,54.98 163.57,54.98 J2.B6 163.64,54.98 164.33,54.98 v164.61,54.71 | v157.47,50.21 157.2,50.48 156.3,50.48 D1.6
  Bottom 0.15: v157.47,50.21 160.11,50.21 v164.61,54.71
EPD_3V3  (via drill 0.3)
  Top 0.15: 90.86,28.18 87.67,28.18 L1.2 | 90.86,28.18 96.74,28.18 98.33,29.78 98.75,29.78 C16.1 | J1.15 84.97,14.82 84.55,14.82 J1.16 84.55,14.89 v84.55,15.58 85.25,15.58 89.75,20.08 90.16,20.08 C12.1 90.23,20.15 90.86,20.77 90.86,28.18 | v72.5,16.2 71.47,16.2 Q2.2
  Bottom 0.15: v72.5,16.2 74.72,16.2 75.9,15.03 84,15.03 v84.55,15.58
EPD_3V3_C  (via drill 0.3)
  Top 0.15: 70.01,19.04 69.6,18.63 69.6,16.27 Q2.1 | 70.01,19.04 70.98,19.04 73.2,16.83 73.2,16.41 R_CL1.1 | v47.51,42.45 47.51,52.42 42.38,57.55 25.9,57.55 20.5,62.95 20.5,63.23 U2.18 | v66.69,23.27 66.69,22.44 70.01,19.11 70.01,19.04
  Bottom 0.15: v66.69,23.27 v47.51,42.45
EPD_BUSY  (via drill 0.3)
  Top 0.15: v86.77,16.41 88.02,15.17 88.02,14.82 J1.9 | v35.25,54.98 35.25,55.68 35.46,55.88 35.46,56.72 34.9,57.27 17.38,57.27 12.4,62.26 11.01,62.26 10.32,62.95 10.32,63.23 U2.26 10.25,63.29 10.25,65.09 8.03,67.31 7.06,67.31 5.82,66.06 2.49,66.06 TP9.TP
  Bottom 0.15: v86.77,16.41 85.66,16.41 81.92,20.15 79.78,20.15 56.85,43.07 42.73,43.07 35.25,50.55 v35.25,54.98
EPD_CS  (via drill 0.3)
  Top 0.15: v5.26,81.58 7.83,84.14 7.83,93.56 11.84,97.57 12.88,97.57 13.57,96.88 13.85,96.88 D6.2 | v14.61,47.64 18.77,47.64 20.43,45.98 20.43,45.77 U2.11 | v85.8,13.71 86.49,14.4 86.49,14.75 J1.12 | v72.37,13.71 71.53,12.88 R9.1 | v133.51,51.45 133.51,51.59 131.51,53.6 131.51,54.71 138.92,62.12 150.34,62.12 TP10.TP
  Bottom 0.15: v5.26,81.58 5.26,56.99 v14.61,47.64 14.61,44.18 45.08,13.71 v72.37,13.71 v85.8,13.71 85.87,13.71 86.08,13.5 101.31,13.5 127.28,39.47 127.28,45.22 v133.51,51.45
EPD_DC  (via drill 0.3)
  Top 0.15: v86.7,13.99 86.98,14.27 86.98,14.75 J1.11 | v15.58,44.25 14.06,44.25 12.88,45.43 12.88,45.7 U2.5 | v30.82,60.25 20.29,70.77 20.29,82.34 TP11.TP
  Bottom 0.15: v86.7,13.99 86.15,13.99 85.66,14.47 68.49,14.47 38.71,44.25 34.62,44.25 | v15.58,44.25 34.62,44.25 | v30.82,60.25 30.82,49.72 29.36,48.27 29.36,47.99 29.71,47.64 32.34,47.64 34,49.31 34.28,49.31 34.62,48.96 34.62,44.25
EPD_RST  (via drill 0.3)
  Top 0.15: 87.64,14.3 90.3,11.63 93.28,11.63 124.1,42.45 124.1,52.49 136.63,65.03 150.41,65.03 TP12.TP | 87.64,14.3 87.53,14.4 87.53,14.75 J1.10 | v20.98,57.76 16.69,62.05 16.69,63.23 U2.21 | v23.82,54.91 27.91,54.91 v32.27,50.55 | 87.64,14.3 v87.32,13.99
  Bottom 0.15: v23.82,54.91 v20.98,57.76 | v32.27,50.55 33.24,49.58 35.11,49.58 69.94,14.75 86.56,14.75 v87.32,13.99
FLASH_CS  (via drill 0.3)
  Top 0.15: v49.72,39.61 50.48,38.85 R5.1 | v47.99,41.34 47.99,42.45 48.82,43.28 D9.2 | v34.35,56.02 34.49,56.16 34.49,56.65 U1.1 | v32.89,50.55 29.98,47.64 23.34,47.64 21.74,46.05 21.74,45.77 U2.12
  Bottom 0.15: v49.72,39.61 v47.99,41.34 44.04,41.34 34.35,51.04 | 34.35,51.04 v34.35,56.02 | v32.89,50.55 33.79,50.55 34.28,51.04 34.35,51.04
GDR  (via drill 0.3)
  Top 0.15: v90.44,16.97 91.48,15.93 91.48,14.82 J1.2 | v82.06,25.35 80.61,25.35 Q3.1 80.54,25.41 80.05,25.9 78.39,25.9 78.18,25.69 78.18,25.21 77.21,24.24 77.21,24.1 R12.1
  Bottom 0.15: v90.44,16.97 90.23,16.97 84.55,22.64 84.55,22.85 v82.06,25.35
GND  (via drill 0.3)
  Top 0.15: C20.2 67.31,109.48 67.03,109.48 65.65,108.1 CHANGE_BUTTON.2 65.58,108.1 62.12,108.1 CHANGE_BUTTON.1 62.05,108.1 61.35,108.79 60.18,108.79 59.62,109.35 52.49,109.35 C_DELAY.2 52.42,109.35 52.15,109.35 50.83,108.03 RESET_BUTTON.2 50.76,108.1 47.37,108.1 RESET_BUTTON.1 47.3,108.1 46.81,108.1 46.26,108.65 26.45,108.65 25.9,108.1 BOOT_BUTTON.2 25.76,108.1 22.37,108.1 BOOT_BUTTON.1 | C19.2 20.71,109.21 21.12,109.21 22.3,108.03 BOOT_BUTTON.1 | BOOT_BUTTON.1 22.3,107.96 22.3,107.61 14.68,100 7.83,100 7.34,99.51 C9.2 7.27,99.44 7.27,99.23 2.98,94.94 2.98,94.25 J4.G4 2.98,94.18 2.98,93.83 5.4,91.41 5.61,91.41 J4.P6 5.4,91.34 4.22,90.16 4.22,81.02 | C18.2 51.8,100.14 51.59,99.93 50.69,99.93 49.38,98.61 47.64,98.61 IC2.3 47.58,98.54 26.73,98.54 17.11,88.92 17.04,88.92 | D6.1 12.4,96.81 12.4,93.56 16.2,89.75 J4.G2 16.27,89.68 17.04,88.92 | 17.04,88.92 17.04,85.87 16.27,85.11 16.27,84.07 J4.G1 16.2,84 8.31,84 5.33,81.02 4.22,81.02 | D8.1 50.41,41.83 48.89,41.83 D9.1 48.82,41.76 48.82,41.55 48.13,40.86 47.85,40.86 46.95,41.76 46.05,41.76 D10.1 45.98,41.83 45.98,42.1 43.97,44.11 v43.97,44.32 | 35.66,52.91 36.56,52.91 38.36,54.71 U1.9 | 35.66,52.91 34.56,52.91 U1.4 | 35.66,52.91 35.66,49.31 | 35.66,49.31 35.66,49.03 34.97,48.34 34.97,48.13 D11.1 34.9,48.06 34.42,48.06 27.49,41.13 12.12,41.13 7.76,45.5 7.76,45.7 U2.1 7.76,45.77 7.76,47.3 12.19,51.73 U2.29_1 | 35.66,49.31 v37.53,49.31 | U2.29_1 12.26,51.8 12.26,52.98 U2.29_2 12.33,52.98 13.43,52.98 U2.29_5 | U2.29_1 12.33,51.8 13.43,51.8 U2.29_4 13.5,51.8 14.68,51.8 U2.29_7 14.75,51.8 14.75,52.98 U2.29_8 14.75,53.05 14.75,54.22 U2.29_9 14.68,54.29 13.5,54.29 U2.29_6 13.43,54.29 12.26,54.29 U2.29_3 12.26,54.36 7.76,58.86 7.76,63.23 U2.28 7.69,63.29 6.58,63.29 5.33,64.54 1.87,64.54 0.97,65.44 0.97,66.76 6.27,72.06
  Top 0.15: 6.27,72.06 2.22,76.11 TP4.TP 2.15,76.17 2.01,76.31 2.01,81.02 J4.G3 2.08,81.02 4.22,81.02 | 6.27,72.06 8.52,69.8 15.72,69.8 19.46,66.06 TP5.TP | C7.2 75.69,19.32 75.69,20.01 77.08,21.4 D12.1 | D12.1 76.94,21.33 76.11,22.16 76.11,24.1 77.14,25.14 77.14,25.28 R12.2 77.21,25.35 77.21,25.76 83.65,32.2 85.11,32.2 86.36,33.45 95.08,33.45 | C12.2 90.16,21.4 88.64,21.4 C13.2 88.57,21.4 C14.2 86.98,21.4 85.32,21.4 C11.2 85.25,21.4 83.65,21.4 C4.2 83.65,21.33 82.89,21.33 | 82.89,21.33 82.06,21.33 C5.2 81.99,21.33 80.54,21.33 C6.2 80.47,21.26 80.19,21.26 79.71,20.77 77.97,20.77 77.35,21.4 77.14,21.4 D12.1 | R3.1 68.63,14.47 68.63,13.02 68.21,12.6 SJ1.1 68.21,12.53 68.21,12.4 69.11,11.49 71.26,11.49 75.93,16.17 | 75.93,16.17 79.71,12.4 J1.MP2 79.57,12.33 81.92,12.33 84,14.4 84,14.75 J1.17 84,14.82 84,15.93 82.89,17.04 82.89,21.33 | 75.93,16.17 75,17.11 75,18.28 74.03,19.25 73.82,19.25 C8.2 | 87.95,52.42 87.95,57.69 87.74,57.89 87.74,59.76 87.19,60.32 87.19,61.49 87.32,61.63 87.74,61.63 89.12,63.02 89.61,63.02 C10_SUPERCAP.2 | 87.95,52.42 85.73,50.21 85.73,49.65 U3.13 | 92.66,12.33 93,12.33 J1.MP1 | 92.66,12.33 90.65,12.33 88.57,14.4 88.57,14.75 J1.8 | 92.66,20.57 92.03,21.19 92.03,21.4 C10.2 | 92.66,12.33 92.66,20.57 | 95.08,31.09 94.87,31.09 D4.1 | 95.08,31.09 C16.2 98.75,31.02 99.44,30.33 99.44,27.29 92.73,20.57 92.66,20.57 | 95.08,31.09 95.08,33.45 | 95.08,33.45 95.08,49.03 C15.2 95.01,49.1 93.9,50.21 v93.9,50.62 | v91.96,52.42 87.95,52.42 | C2_BAT.2 159.41,7.34 158.86,6.79 157.89,6.79 157.61,6.51 157.61,6.44 157.27,6.09 R2_BAT.1 157.27,6.03 157.27,5.68 158.1,4.85 160.31,4.85 164.33,8.86 164.33,17.66 J3.1 164.4,17.73 164.75,17.73 165.3,18.28 165.3,49.24
  Top 0.15: C1_BAT.2 160.38,7.34 159.48,7.34 C2_BAT.2 | v159.14,8.66 159.14,7.62 159.34,7.41 C2_BAT.2 | R1_PWRUSB.1 125.2,36.77 124.37,36.77 122.92,38.23 122.92,39.33 123.61,40.03 123.89,40.03 C1_BAT2.2 123.96,40.1 v124.72,40.1 124.72,40.93 131.92,48.13 C3.2 | v126.8,39.61 128.25,39.61 IC1.2 | J2.B12 163.64,51.24 163.64,50.97 J2.A1 163.64,50.9 163.64,49.79 164.19,49.24 J2.MP3 164.26,49.24 165.3,49.24 | 165.3,49.24 166.2,49.24 | 166.2,49.24 168.07,49.24 J2.MP1 | 166.2,59.42 164.26,59.42 J2.MP4 164.19,59.35 163.64,58.79 163.64,57.69 J2.A12 163.64,57.62 163.64,57.41 J2.B1 163.57,57.34 162.88,57.34 157.82,52.28 R2-USB.2 | 166.2,59.42 168.07,59.42 J2.MP2 | 166.2,59.42 166.2,49.24 | MCP73831.2 134.62,51.04 134.83,51.04 135.8,52.01 135.8,53.18 137.25,54.64 137.25,54.85 C1.2 137.32,54.91 137.39,54.98 v138.08,54.98 146.05,54.98 150.55,50.48 C4_USB.2 150.62,50.48 151.73,50.48 152.63,49.58 153.74,49.58 D1.2 153.8,49.58 154.08,49.58 156.71,52.22 157.75,52.22 R2-USB.2 | C2.- 134.48,40.16 134.97,40.65 137.67,40.65 C1_BAT1.2 137.74,40.72 137.74,44.53 138.99,45.77 138.99,46.19 139.12,46.33 154.15,46.33 154.84,45.64 R2-USB1.1 154.98,45.64 156.3,46.95 C5_USB.2 156.3,47.02 158.51,49.24 158.51,51.38 157.75,52.15 R2-USB.2
  Bottom 0.15: v37.53,49.31 42.52,44.32 v43.97,44.32 81.44,44.32 87.46,50.34 89.75,50.34 91.83,52.42 v91.96,52.42 92.1,52.42 v93.9,50.62 94.11,50.62 94.39,50.9 126.87,50.9 129.6,48.16 | U4.9 158.86,10.66 159.07,10.46 159.07,9.76 U4.6 159.14,9.7 v159.14,8.66 | U4.1 158.17,11.7 158.17,11.36 158.79,10.73 U4.9 | U4.4 159.55,11.7 159.55,11.36 158.93,10.73 U4.9 | v124.72,40.1 125.2,39.61 v126.8,39.61 126.8,45.36 129.6,48.16 | SENSOR2.5 144.39,52.77 144.66,52.77 145.15,53.25 145.15,53.81 144.66,54.29 144.39,54.29 SENSOR2.7 144.66,54.36 145.15,54.85 145.15,55.4 144.94,55.61 143.83,55.61 143.35,55.12 141.48,55.12 SENSOR2.1 141.41,55.05 138.15,55.05 v138.08,54.98 137.12,54.98 134.83,52.7 134.14,52.7 129.6,48.16
  pour Top: 169.92,0.08 170.12,67.12 92.18,67.12 92.16,67.14 92.14,67.16 92.12,67.18 92.12,111.12 0.08,111.12 0.08,0.08 76.82,0.08 76.82,10.02 76.84,10.04 76.86,10.06 76.88,10.08 95.12,10.08 95.14,10.06 95.16,10.04 95.18,10.02 95.18,0.08
  pour Bottom: 169.92,0.08 170.12,67.12 92.18,67.12 92.16,67.14 92.14,67.16 92.12,67.18 92.12,111.12 0.08,111.12 0.08,0.08 76.82,0.08 76.82,10.02 76.84,10.04 76.86,10.06 76.88,10.08 95.12,10.08 95.14,10.06 95.16,10.04 95.18,10.02 95.18,0.08
GPIO8
  Top 0.15: R1.2 18.91,43.07 18.91,45.5 19.11,45.7 U2.10
I2C_PW  (via drill 0.3)
  Top 0.15: R11.2 126.03,51.52 126.03,50.48 126.73,49.79 129.15,49.79 129.77,50.41 R4.2 129.84,50.41 130.74,49.51 131.71,49.51 132.61,48.61 | 132.61,48.61 132.61,47.71 131.99,47.09 131.99,46.88 C3.1 | v136.91,52.84 137.25,53.18 137.25,53.53 C1.1 | v132.89,48.82 132.68,48.61 132.61,48.61
  Bottom 0.15: v132.89,48.82 v136.91,52.84
IC2_PW
  Bottom 0.15: 143.62,54.36 143.62,54.64 144.04,55.05 144.32,55.05 SENSOR2.8 | 143.62,54.36 143.62,54.02 144.11,53.53 144.32,53.53 SENSOR2.6 | 143.62,54.36 141.48,54.36 SENSOR2.2
INT_RTC  (via drill 0.3)
  Top 0.15: v90.16,58.86 92.59,58.86 R1_PINH1.1 | v87.46,57.55 87.46,58.45 86.98,58.93 U3.3 | v90.09,87.95 90.09,99.86 TP15.TP
  Bottom 0.15: v87.46,57.55 88.78,58.86 v90.16,58.86 90.16,58.93 90.65,59.42 90.65,59.76 90.09,60.32 v90.09,87.95
IO/BOOT  (via drill 0.3)
  Top 0.15: R_BOOT.2 27.56,109.28 26.11,109.28 25.83,109.55 BOOT_BUTTON.3 25.76,109.62 22.37,109.62 BOOT_BUTTON.4 22.3,109.62 22.09,109.83 20.08,109.83 19.94,109.69 19.94,108.86 20.64,108.17 C19.1 20.71,107.89 v21.33,107.27 | v24.24,64.4 24.24,63.29 U2.15
  Bottom 0.15: v24.24,64.4 24.24,104.36 v21.33,107.27
IO/CHANGE  (via drill 0.3)
  Top 0.15: C20.1 67.38,108.24 67.38,108.44 68,109.07 68,109.97 67.86,110.11 66.13,110.11 65.65,109.62 CHANGE_BUTTON.3 65.58,109.62 62.12,109.62 CHANGE_BUTTON.4 62.05,109.55 60.59,109.55 R_CHANGE.2 60.52,109.55 60.25,109.83 v59.76,109.83 | v16,64.33 14.89,64.33 14.13,63.57 14.13,63.29 U2.23
  Bottom 0.15: v16,64.33 23.68,64.33 24.1,63.92 24.38,63.92 59.76,99.31 v59.76,109.83
MISO  (via drill 0.3)
  Top 0.15: v7.41,97.02 8.52,98.13 R8.1 | v4.85,94.46 4.85,93.07 5.47,92.45 5.75,92.45 J4.P7 | v77.97,22.58 78.53,22.02 78.53,21.47 D12.2 | v34.97,56.02 34.42,55.47 U1.2 18.84,55.4 12.26,61.98 10.04,61.98 9.07,62.95 9.07,63.23 U2.27 9,63.29 9,63.5 7.69,64.82 2.01,64.82 1.25,65.58 1.25,66.55 2.29,67.59 4.22,67.59 | 4.22,67.59 12.81,67.59 14.34,66.06 17.66,66.06 TP6.TP | v4.22,67.66 4.22,67.59
  Bottom 0.15: v7.41,97.02 v4.85,94.46 4.85,90.65 4.22,90.03 v4.22,67.66 | v77.97,22.58 77.77,22.58 56.99,43.35 42.87,43.35 35.73,50.48 35.73,55.26 v34.97,56.02
MOSI  (via drill 0.3)
  Top 0.15: v6.92,87.67 6.58,88.02 5.82,88.02 J4.P3 | v11.08,67.1 11.56,67.1 12.6,66.06 TP7.TP | J1.14 85.45,14.75 85.45,14.34 82.34,11.22 67.86,11.22 46.12,32.96 46.12,38.71 R7.1 46.05,38.78 42.94,38.78 42.31,39.4 42.31,46.19 | 42.31,46.19 42.31,52.84 U1.5 | v34.14,48.82 34.9,49.58 D11.2 | 42.31,46.19 v34.14,46.19 | v16.27,46.88 15.37,45.98 15.37,45.77 U2.7
  Bottom 0.15: v6.92,87.67 6.92,86.01 6.86,85.94 6.86,81.02 11.08,76.8 v11.08,67.1 11.08,61.91 15.51,57.48 15.51,47.71 16.27,46.95 v16.27,46.88 17.59,46.88 18.28,46.19 v34.14,46.19 v34.14,48.82
N$1  (via drill 0.3)
  Top 0.15: v160.04,49.44 156.23,45.64 R2-USB1.2 | v164.61,52.63 164.19,53.05 163.64,53.05 J2.A5
  Bottom 0.15: v160.04,49.44 161.42,49.44 v164.61,52.63
N$2  (via drill 0.3)
  Top 0.15: v80.54,15.93 80.54,14.82 J1.24 | v83.38,17.66 83.38,19.67 C4.1
  Bottom 0.15: v80.54,15.93 81.65,15.93 v83.38,17.66
N$3  (via drill 0.3)
  Top 0.15: D2.1 125.55,38.43 128.04,38.43 128.25,38.64 IC1.3 128.32,38.71 128.46,38.71 129.01,39.27 129.01,39.33 | 129.01,39.33 129.01,40.03 128.46,40.58 IC1.1 | Q1.2 139.61,45.64 139.61,41.41 137.74,39.54 137.74,39.4 C1_BAT1.1 137.67,39.33 v136.56,39.33 | v132.61,39.33 129.01,39.33
  Bottom 0.15: v136.56,39.33 v132.61,39.33
N$4
  Top 0.15: CHG_LED.C 128.39,51.87 126.8,51.87 126.45,52.22 125.48,52.22 125.27,52.01 125.27,42.52 122.64,39.89 122.64,38.09 152.77,7.96 157.75,7.96 158.31,7.41 R1_BAT.2
N$5  (via drill 0.3)
  Top 0.15: v156.44,7.41 157.2,7.41 R2_BAT.2 | v132.47,49.38 132.47,49.51 131.99,50 MCP73831.5
  Bottom 0.15: v156.44,7.41 156.44,9.76 137.05,29.15 137.05,44.04 132.41,48.68 132.41,49.31 v132.47,49.38
N$6  (via drill 0.3)
  Top 0.15: v157.13,51.59 157.75,50.97 R2-USB.1 | v164.61,55.61 164.19,56.02 163.64,56.02 J2.B5
  Bottom 0.15: v157.13,51.59 160.59,51.59 v164.61,55.61
N$7  (via drill 0.3)
  Top 0.15: v158.24,5.33 158.24,6.03 R1_BAT.1 | v137.32,47.3 134.62,50 MCP73831.1
  Bottom 0.15: v158.24,5.33 158.24,8.38 137.32,29.29 v137.32,47.3
N$8
  Top 0.15: R_CAPACITOR.2 88.57,47.51 90.79,47.51 92.38,49.1 D7.1
N$9
  Top 0.15: J1.22 81.51,14.82 81.51,18.97 80.54,19.94 C6.1
N$10  (via drill 0.3)
  Top 0.15: v49.58,100.48 50.34,100.48 IC2.5 | v53.25,108.03 52.49,108.03 C_DELAY.1
  Bottom 0.15: v49.58,100.48 49.58,104.36 v53.25,108.03
N$11  (via drill 0.3)
  Top 0.15: v82.13,15.58 82.48,15.23 82.48,14.82 J1.20 | v74.1,17.24 74.1,17.66 73.82,17.94 C8.1
  Bottom 0.15: v82.13,15.58 80.81,15.58 80.68,15.44 75.9,15.44 v74.1,17.24
N$12  (via drill 0.3)
  Top 0.15: v82.89,15.58 82.96,15.51 82.96,14.82 J1.19 | v88.5,17.04 91.55,20.08 91.96,20.08 C10.1
  Bottom 0.15: v82.89,15.58 83.1,15.58 83.38,15.3 83.65,15.3 84.42,16.07 85.18,16.07 85.94,15.3 86.77,15.3 v88.5,17.04
N$13  (via drill 0.3)
  Top 0.15: v83.52,15.79 83.52,14.82 J1.18 | v83.52,17.04 83.52,17.17 85.25,18.91 85.25,20.08 C11.1
  Bottom 0.15: v83.52,17.04 v83.52,15.79
N$15  (via drill 0.3)
  Top 0.15: 93.42,29.02 96.33,29.02 96.88,29.57 D4.2 | 93.42,29.02 92.73,29.02 90.72,31.02 86.01,31.02 85.87,30.89 85.87,26.38 84.83,25.35 84.83,22.85 84.21,22.23 81.37,22.23 79.64,23.96 78.94,23.96 C17.1 | v93.42,27.7 93.42,26.04 D3.1 | 93.42,29.02 v93.42,28.81
  Bottom 0.15: v93.42,28.81 v93.42,27.7
N$22  (via drill 0.3)
  Top 0.15: v89.96,17.87 89.96,14.82 J1.5 | v88.43,19.39 88.43,19.94 88.57,20.08 C13.1
  Bottom 0.15: v88.43,19.39 v89.96,17.87
N$23  (via drill 0.3)
  Top 0.15: v90.51,13.99 90.51,14.75 J1.4 | v87.05,19.11 87.05,20.08 C14.1
  Bottom 0.15: v90.51,13.99 90.51,15.65 v87.05,19.11
PREVGH
  Top 0.15: J1.21 81.99,14.75 81.99,14.4 81.78,14.2 79.43,14.2 75.69,17.94 C7.1 75.69,18.07 75,18.77 75,24.31 83.52,32.83 D5.1
PREVGL  (via drill 0.3)
  Top 0.15: 81.3,20.57 81.44,20.57 81.99,20.01 C5.1 | 81.3,20.57 79.92,20.57 79.78,20.43 79.78,19.6 81.02,18.35 81.02,14.82 J1.23 | v94.32,25.97 96.81,25.97 D3.2 | v81.3,20.64 81.3,20.57
  Bottom 0.15: v94.32,25.97 82.06,25.97 81.3,25.21 v81.3,20.64
RESE  (via drill 0.3)
  Top 0.15: v91,15.79 91,14.82 J1.3 | v84.07,22.71 84.07,23.55 R13.1 84,23.55 83.52,24.03 80.61,24.03 Q3.2
  Bottom 0.15: v84.07,22.71 v91,15.79
RESE'  (via drill 0.3)
  Top 0.15: SJ1.2 69.73,12.6 69.94,12.81 69.94,14.47 R3.2 70.01,14.54 v70.01,15.3 | v76.59,22.3 77.35,23.06 78.25,23.06 79.36,21.95 84.35,21.95 85.39,22.99 85.39,23.55 R13.2
  Bottom 0.15: v76.59,22.3 76.59,21.88 v70.01,15.3
RESET  (via drill 0.3)
  Top 0.15: R_RESET.2 45.77,109.42 47.16,109.42 47.3,109.55 RESET_BUTTON.4 47.37,109.62 49.51,109.62 | 49.51,109.62 50.76,109.62 RESET_BUTTON.3 | 49.51,101.04 49.03,100.55 47.64,100.55 IC2.1 | 49.51,101.04 52.01,101.04 52.49,100.55 52.49,99.51 51.87,98.89 C18.1 51.8,98.82 v51.8,90.72 | v16,51.94 10.32,46.26 10.32,45.77 U2.3 | v49.51,108.58 49.51,109.62 | 49.51,101.04 v49.51,104.91
  Bottom 0.15: v16,51.94 16,54.91 v51.8,90.72 | v49.51,104.91 v49.51,108.58
RTC_RST  (via drill 0.3)
  Top 0.15: v24.31,61.7 22.99,63.02 22.99,63.23 U2.16 | v83.31,61.7 85.66,59.35 85.66,59 U3.4
  Bottom 0.15: v83.31,61.7 v24.31,61.7
RX  (via drill 0.3)
  Top 0.15: v12.81,64.68 12.81,63.29 U2.24 | v12.81,74.86 12.81,75.69 12.4,76.11 TP2.TP
  Bottom 0.15: v12.81,74.86 v12.81,64.68
SCK  (via drill 0.3)
  Top 0.15: v15.1,47.16 14.13,46.19 14.13,45.77 U2.6 | v8.52,65.09 7.62,66 TP8.TP | v4.71,89.89 5.05,90.23 5.75,90.23 J4.P5 | v86.08,15.79 86.08,14.82 J1.13 | v64.68,22.78 48.75,38.71 R6.1 48.68,38.78 48.13,39.33 45.64,39.33 44.11,40.86 | 43.21,43.84 43.21,41.76 44.11,40.86 | 43.21,43.84 43.21,52.91 42.31,53.81 42.31,54.08 U1.6 | v44.87,43.84 45.36,43.35 45.98,43.35 D10.2 | 43.21,43.84 v43,43.84 | 44.11,40.86 v42.8,39.54
  Bottom 0.15: v4.71,89.89 4.71,82.75 8.52,78.94 v8.52,65.09 8.52,64.06 15.1,57.48 v15.1,47.16 15.1,44.11 19.67,39.54 v42.8,39.54 | v86.08,15.79 85.87,15.79 81.78,19.88 79.64,19.88 76.73,22.78 v64.68,22.78 | v43,43.84 v44.87,43.84
SCL  (via drill 0.3)
  Top 0.15: v133.72,49.03 132.89,49.86 132.89,50.28 132.06,51.11 129.36,51.11 128.74,50.48 128.53,50.48 R4.1 128.46,50.41 v126.73,50.41 | v162.88,19.67 163.08,19.67 164.05,20.64 164.33,20.64 J3.4 | v85.73,51.87 79.78,57.82 32.62,57.82 25.55,64.89 24.1,64.89 24.03,64.82 19.25,64.82 17.94,63.5 17.94,63.29 U2.20 | v88.85,50.83 88.85,50.28 89.47,49.65 U3.16 89.54,49.65 90.03,50.14 v90.16,50.14
  Bottom 0.15: 137.74,49.03 v133.72,49.03 | 137.74,49.03 141.41,52.7 SENSOR2.4 | U4.7 158.58,9.7 158.58,9.42 158.31,9.14 157.89,9.14 157.47,9.56 157.47,14.27 v162.88,19.67 162.88,22.37 137.74,47.51 137.74,49.03 | v85.73,51.87 86.28,51.87 87.32,50.83 v88.85,50.83 | v126.73,50.41 94.32,50.41 94.04,50.14 v90.16,50.14
SDA  (via drill 0.3)
  Top 0.15: v24.45,57.76 19.18,63.02 19.18,63.23 U2.19 | v33.66,56.78 v25.41,56.78 | v87.46,51.31 87.46,50.76 88.22,50 88.22,49.65 U3.15 | v163.36,19.18 163.84,19.18 164.33,19.67 J3.3 | v125.83,52.98 124.72,51.87 124.72,51.59 R11.1
  Bottom 0.15: v25.41,56.78 v24.45,57.76 | v33.66,56.78 36.29,56.78 41.13,51.94 85.18,51.94 85.59,52.35 86.42,52.35 v87.46,51.31 90.23,51.31 91.89,52.98 v125.83,52.98 134.69,52.98 137.6,55.88 145.08,55.88 145.43,55.54 145.43,52.7 144.94,52.22 | U4.8 158.1,9.76 158.1,10.04 157.75,10.39 157.75,13.57 v163.36,19.18 163.36,33.73 144.94,52.15 144.94,52.22 | 144.94,52.22 143,52.22 141.75,53.46 141.48,53.46 SENSOR2.3
SRC
  Top 0.15: C17.2 78.94,25.28 79.57,25.28 80.05,24.79 82.61,24.79 Q3.3 82.61,24.86 82.61,27.7 83.03,28.12 L1.1 83.1,28.18 83.1,28.53 87.05,32.48 D5.2
SS_SD  (via drill 0.3)
  Top 0.15: v31.51,48.13 33.31,48.13 R10.1 | 16.48,48.13 13.71,48.13 11.56,45.98 11.56,45.77 U2.4 | 16.48,48.13 v29.85,48.13 | v47.99,45.84 50.41,43.42 D8.2 | v7.34,85.8 6.23,86.91 J4.P2 | v15.51,58.1 15.51,53.05 16.48,52.08 16.48,48.13
  Bottom 0.15: v29.85,48.13 v31.51,48.13 31.51,53.81 34.21,56.51 35.11,56.51 45.77,45.84 v47.99,45.84 | v7.34,85.8 7.34,80.95 15.51,72.78 v15.51,58.1
TX  (via drill 0.3)
  Top 0.15: v11.56,65.16 11.56,63.29 U2.25 | v11.56,70.29 17.38,76.11 TP1.TP
  Bottom 0.15: v11.56,70.29 v11.56,65.16
USB_D+  (via drill 0.3)
  Top 0.15: v134.14,55.47 147.16,55.47 152.07,50.55 153.74,50.55 D1.1 | v41.27,52.42 35.52,46.67 v33.66,46.67 | v25.21,46.67 24.31,45.77 U2.14
  Bottom 0.15: v134.14,55.47 133.93,55.47 131.92,53.46 42.31,53.46 v41.27,52.42 | v25.21,46.67 v33.66,46.67
USB_D-  (via drill 0.3)
  Top 0.15: v151.52,50 152.9,48.61 153.74,48.61 D1.3 | v23.89,46.88 22.99,45.98 22.99,45.77 U2.13
  Bottom 0.15: v151.52,50 151.38,50 145.22,56.16 134.21,56.16 132.13,54.08 39.4,54.08 32.76,60.73 30.68,60.73 23.89,53.95 v23.89,46.88
VBAT  (via drill 0.3)
  Top 0.15: v159.41,5.33 159.41,6.03 C2_BAT.1 | v136.28,52.84 138.64,50.48 138.64,47.78 Q1.3 | v135.31,52.56 135.18,52.56 134.62,52.01 MCP73831.3 134.55,52.01 v131.99,54.57 | v91.34,67.1 74.86,83.58 18,83.58 10.6,76.17 7.27,76.17 TP3.TP
  Bottom 0.15: U4.2 158.65,11.7 159.07,11.7 U4.3 159.14,11.77 159.14,12.05 159.41,12.33 159.76,12.33 159.97,12.12 159.97,8.86 159.41,8.31 v159.41,5.33 158.86,5.33 158.38,4.85 158.1,4.85 131.99,30.95 131.99,49.51 133.44,50.97 133.65,50.97 135.25,52.56 v135.31,52.56 135.59,52.84 v136.28,52.84 | v91.34,67.1 103.88,54.57 v131.99,54.57
VBUS  (via drill 0.3)
  Top 0.15: C1_BAT.1 160.45,6.09 160.45,6.3 161.08,6.92 161.08,33.86 151.87,43.07 R2.1 151.8,43.07 142.93,43.07 135.73,35.87 127.42,35.87 126.59,36.7 R1_PWRUSB.2 126.52,36.77 126.38,36.77 125.41,37.74 123.82,37.74 123.2,38.36 123.2,39.2 123.47,39.47 124.72,39.47 125.48,40.23 125.48,40.44 D2.2 125.55,40.58 126.73,40.58 132.41,46.26 132.47,46.26 134.79,48.58 | 154.98,48.06 154.98,48.54 155.95,49.51 156.23,49.51 D1.5 | 154.98,48.06 154.98,47.02 C5_USB.1 | 154.98,48.06 153.04,48.06 151.94,49.17 150.62,49.17 C4_USB.1 150.55,49.17 141.27,49.17 137.74,45.64 Q1.1 137.67,45.7 134.79,48.58 | 134.79,48.58 133.17,50.21 133.17,50.69 131.99,51.87 MCP73831.4 131.92,51.94 131.85,51.87 129.91,51.87 CHG_LED.A 129.91,51.94 127.28,54.57 v127.28,55.05 | v91.34,85.45 76.94,99.86 TP14.TP
  Bottom 0.15: v91.34,85.45 91.34,67.73 91.83,67.24 91.83,67.03 103.81,55.05 v127.28,55.05
VRTC  (via drill 0.3)
  Top 0.15: C15.1 95.01,51.18 93.83,51.18 93.42,50.76 93.42,48.96 91.2,46.74 88.16,46.74 87.46,47.44 87.32,47.44 R_CAPACITOR.1 87.19,47.44 v86.49,47.44 | 85.94,48.41 86.08,48.41 86.91,49.24 86.91,49.58 U3.14 | 85.94,48.41 85.32,48.41 85.18,48.54 85.18,50.69 86.22,51.73 86.22,60.94 87.39,62.12 87.39,63.02 C10_SUPERCAP.1 | 85.94,48.41 v85.94,48.2
  Bottom 0.15: v86.49,47.44 86.49,47.64 v85.94,48.2
VUSB
  Top 0.15: J2.A4 163.64,51.8 163.64,52.01 J2.B9 | J2.A9 163.64,56.78 163.64,56.58 J2.B4 163.57,56.51 163.01,56.51 162.53,56.02 162.53,52.63 163.08,52.08 163.57,52.08 J2.B9 | J2.B9 163.08,52.01 163.08,51.73 156.78,45.43 156.78,43.56 156.37,43.14 R2.2